# Altium PCB PCB.PcbDoc
Units mil, origin at the board's own origin, x right, y up, seen from the top; angles counter-clockwise.
Board outline 1574.8 x 1929.13 mil, 2 copper layers (Top Layer, Bottom Layer), stack 65.792 mil thick; 18 components, 11 nets, 73 pads, 7 vias.
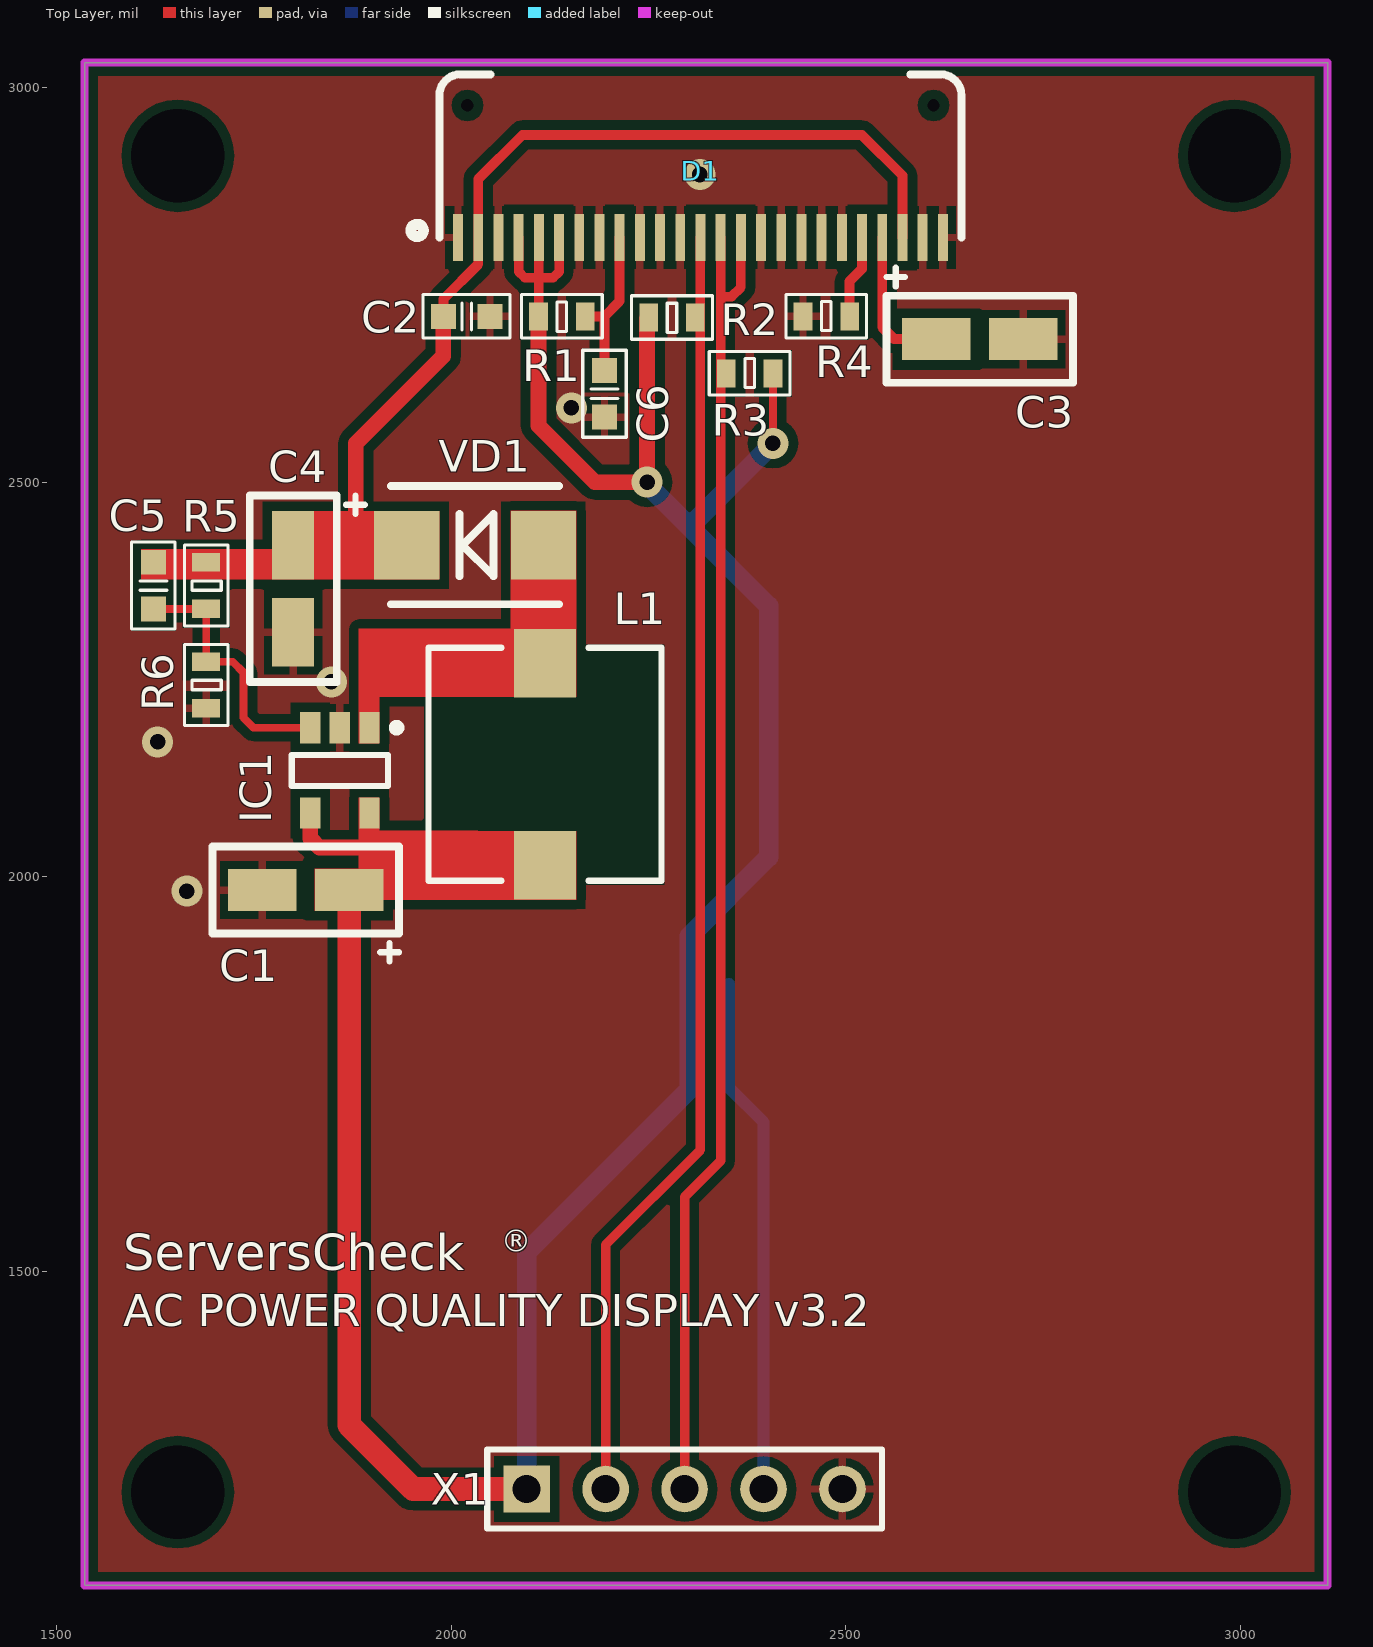
[diagram p0: Top Layer view]
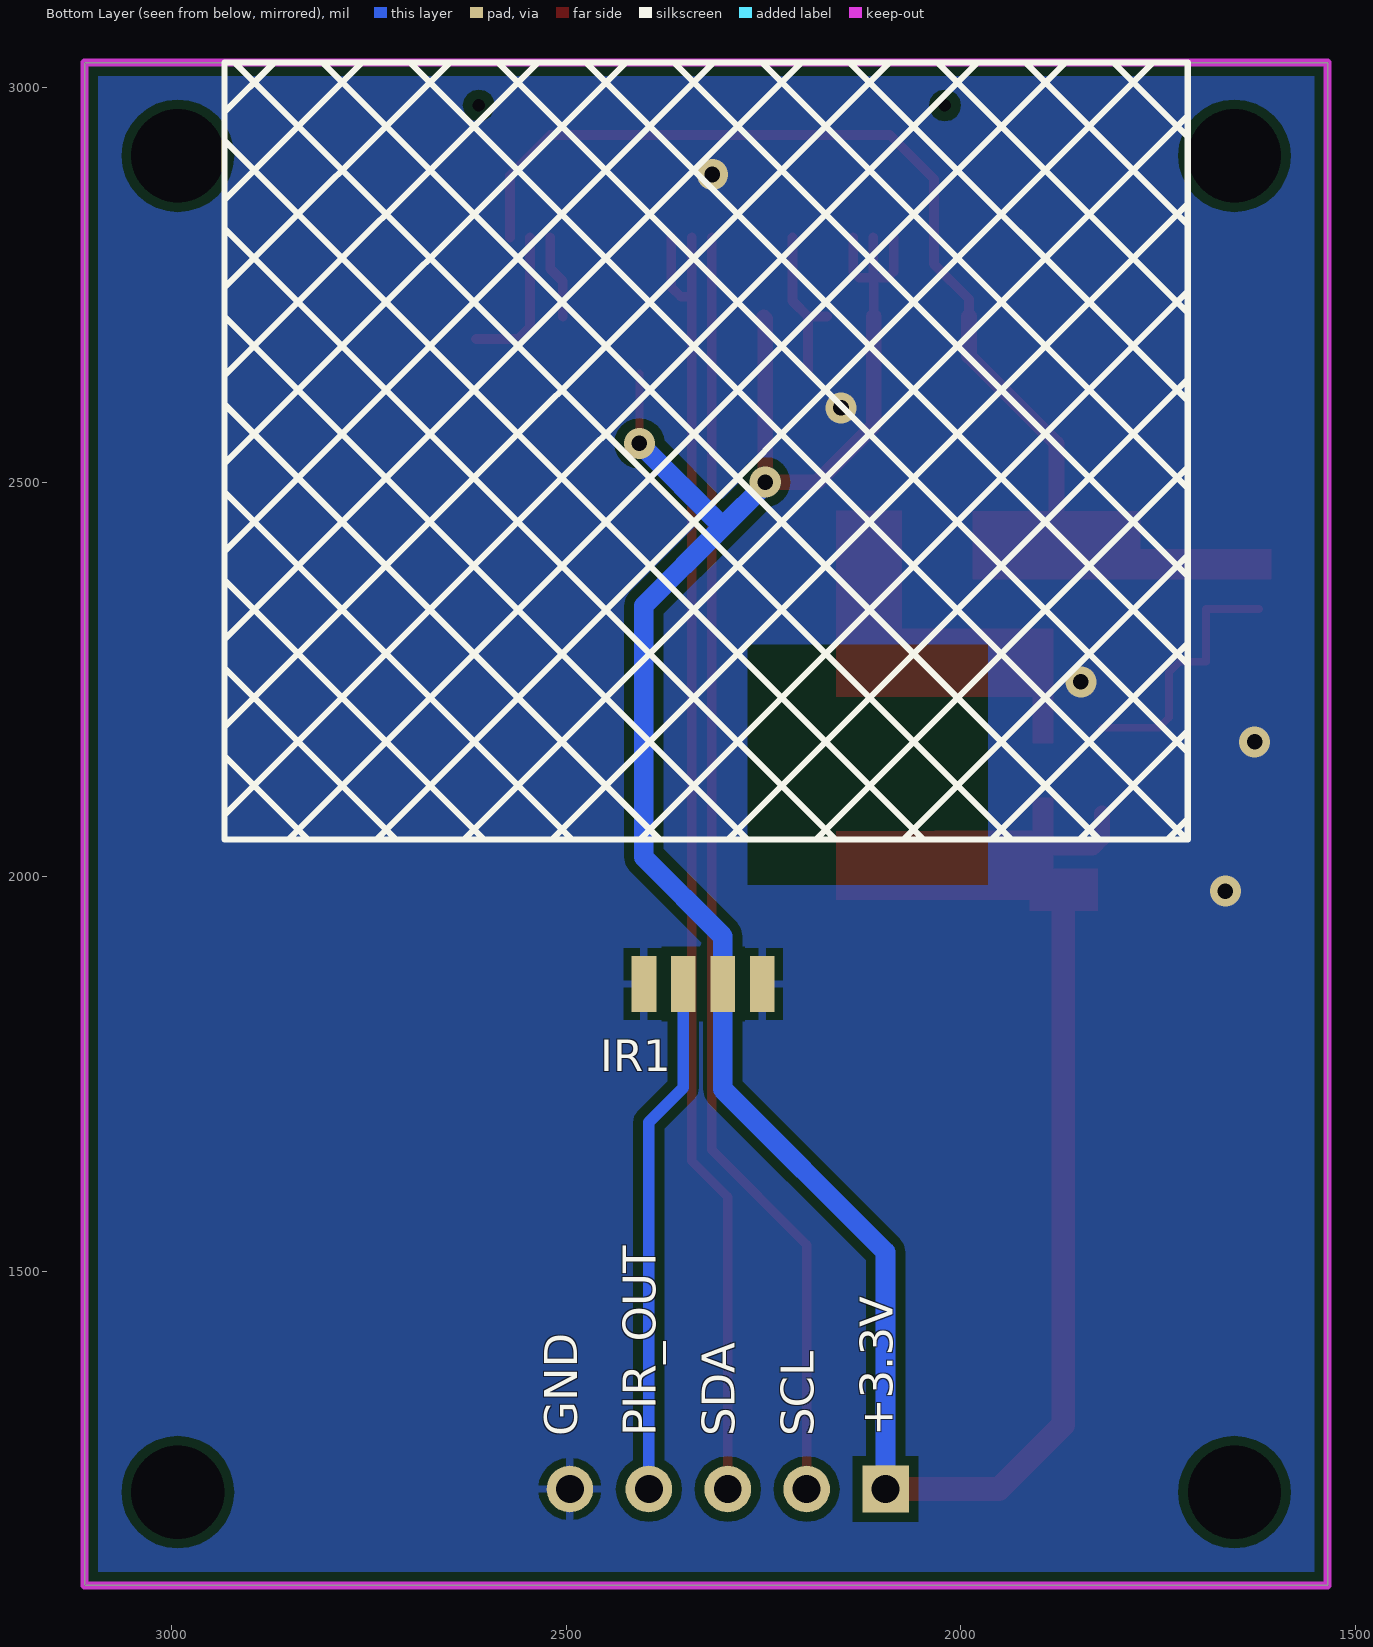
[diagram p1: Bottom Layer view, seen from below]

## Layer stack, top to bottom
Top Solder: solder mask 0.4, Solder Resist, Dk 3.5
Top Layer: signal copper 1.4
Dielectric 1: dielectric 62.9921, FR-4, Dk 4.8
Bottom Layer: signal copper 1.4
Bottom Solder: solder mask 0.4, Solder Resist, Dk 3.5

## Board outline
1535.43,1102.36 3110.24,1102.36 3110.24,3031.5 1535.43,3031.5

## Design rules (kind name [scope] priority, off if disabled: settings)
Clearance [All] p1: gap=7.87 ignorepadtopadclearanceinfootprint=FALSE except(11.81: Arc-Poly Track-Poly SMDPad-Poly THPad-Poly Via-Poly Fill-Poly Poly-Poly Poly-Region Poly-Text Poly-Hole)
HoleSize [All] p1: absolutevalues=TRUE maxlimit=118.11 minlimit=1 maxpercent=80.000 minpercent=20.000
MinimumSolderMaskSliver [All] p1: minsoldermaskwidth=0
PolygonConnect [All] p1: thpad.connectstyle=Relief thpad.reliefconductorwidth=10 thpad.reliefentries=4 thpad.polygonreliefangle="90 Angle" thpad.airgapwidth=10 smdpad.connectstyle=Relief smdpad.reliefconductorwidth=10 smdpad.reliefentries=4 smdpad.polygonreliefangle="90 Angle" smdpad.airgapwidth=10 via.connectstyle=Direct via.reliefconductorwidth=10 via.reliefentries=4 via.polygonreliefangle="90 Angle" via.airgapwidth=10
RoutingVias [All] p1: holewidth=28 width=50 viastyle="Through Hole" minholewidth=19.68 minwidth=39.37 maxholewidth=28 maxwidth=50
SilkToSilkClearance [All] p1: silktosilkclearance=2
SilkToSolderMaskClearance [IsPad] p1: minsilkscreentomaskgap=0 clearancetoexposedcopper=TRUE
SolderMaskExpansion [All] p1: expansion=4
Width [All] p1: maxlimit=100 minlimit=10 preferedwidth=50
26 further rules are at their usual default settings.

## Components (designator, comment, footprint, x,y, rotation, side; value= is the part's Value field where it differs from the comment)
C1 "4.7u" TANTALUM_CAP_SIZE_A 1815.44,1983.17 r180 top
C2 "100n" C_0603 2019.42,2710 r180 top
C3 "4.7u" TANTALUM_CAP_SIZE_A 2669.29,2681.1 r0 top
C4 "4.7u" TANTALUM_CAP_SIZE_A 1799.69,2365.06 r270 top
C5 "100n" C_0603 1622.53,2369 r90 top
C6 "100n" C_0603 2194,2612 r270 top
D1 "UG-9664HSWAG01" UG-9664HSWAG01 2315.59,2810 r0 top
IC1 "FAN5331" SOT23-5 1858.75,2134.75 r270 top
IR1 "TSSP77P38" TSSP77P38 2326.77,1864.17 r0 bottom
L1 "10uH" L-7.5x7.5 2118.59,2142.62 r90 top
R1 "10k" R_0603 2140,2710 r0 top
R2 "4.7k" R_0603 2279.53,2708.66 r0 top
R3 "4.7k" R_0603 2377.95,2637.8 r180 top
R4 "910k" R_0603 2475,2710 r180 top
R5 "150k" R_0603 1689.46,2369 r90 top
R6 "20k" R_0603 1689.46,2243.02 r90 top
VD1 "Schottky Diode" DO-214AA 2030.01,2420.18 r180 top
X1 "PLS-5" PLS-5-3D 2095.5,1224.41 r0 top

## Footprints (in the part's own frame and the unit in brackets; to place one, negate y for a bottom-side part, rotate by r counter-clockwise, add the part's x,y. Pads: shape width x height; smd on the part's side, far side on the other; paste and mask are expansions set on the pad)
C_0603 [mm] "Chip Capacitor; Body 1.6 x 0.8 mm (LxW typ)"
  rect 0.8x0.8 smd: 1(-0.75,0) 2(0.75,0)
  silkscreen extent -1.4,-0.7 1.4,0.7, body extent -0.8,-0.4 0.8,0.4, height 0.3
DO-214AA [mm]
  rect 2.1x2.2 smd: A(-2.2,0) C(2.2,0)
  silkscreen extent -2.7,-1.9 2.7,1.9, body extent -2.7,-1.8 2.7,1.8, height 2.4
L-7.5x7.5 [mm]
  rect 2.2x2 smd: 1(-3.25,0) 2(3.25,0)
  silkscreen extent -3.75,-3.75 3.75,3.75, body extent -3.65,-3.61 3.65,3.69, height 4.5
PLS-5-3D [mm] "Connector; Header; 5 Position"
  rect 1.5x1.5 hole 0.9: 1(0,0)
  round 1.5 hole 0.9: 2(2.54,0) 3(5.08,0) 4(7.62,0) 5(10.16,0)
  silkscreen extent -1.27,-1.27 11.43,1.27, body extent -1.27,-1.27 11.43,1.27, height 8.44
R_0603 [mm]
  rect 0.6x0.9 smd: 1(-0.75,0) 2(0.75,0)
  silkscreen extent -1.3,-0.7 1.3,0.7, body extent -0.8,-0.41 0.8,0.41, height 0.45
SOT23-5 [mm]
  rect 1x0.65 smd: 1(-1.375,0.95) 2(-1.375,0) 3(-1.375,-0.95) 4(1.375,-0.95) 5(1.375,0.95)
  silkscreen extent -1.5,-1.55 0.5,1.95, body extent -1.25,-1.5 1.25,1.5, height 1.15
TANTALUM_CAP_SIZE_A [mm]
  rect 2.2x1.35 smd: 1(-1.4,0) 2(1.4,0)
  silkscreen extent -3,-1.4 3,2.3, body extent -1.7,-0.9 1.7,0.9, height 1.86
TSSP77P38 [mm]
  rect 0.8x1.8 smd: 1(-1.905,0) 2(-0.635,0) 3(0.635,0) 4(1.905,0)
  body extent -3.4,-1.48 3.4,1.52, height 3.2
UG-9664HSWAG01 [mm]
  rect 0x0 hole 0.4: 0(-7.5,4.25) 0(7.5,4.25)
  rect 0.32x1.5 smd: 1(-7.8,0) 2(-7.15,0) 3(-6.5,0) 4(-5.85,0) 5(-5.2,0) 6(-4.55,0) 7(-3.9,0) 8(-3.25,0) 9(-2.6,0) 10(-1.95,0) 11(-1.3,0) 12(-0.65,0) 13(0,0) 14(0.65,0) 15(1.3,0) 16(1.95,0) 17(2.6,0) 18(3.25,0) 19(3.9,0) 20(4.55,0) 21(5.2,0) 22(5.85,0) 23(6.5,0) 24(7.15,0) 25(7.8,0)
  silkscreen extent -8.4,0 8.4,5.25

## Part data
C1 C3 C4: library part "Tantalum Capacitor", "Tantalum Capacitor"
C2 C5 C6: library part C0603, "Capacitor"
D1: "Display"
IC1: "High Efficiency Serial LED Driver and OLED Supp;y with 20V Integrated Switch"
IR1: "IR Detector for Mid Range Proximity Sensor"
L1: library part L, "Inductor"
R1 R2 R3 R4 R5 R6: library part R0603, "Resistor"
VD1: library part Schottky, "SCHOTTKY BARRIER RECTIFIER"
X1: "Header, 5-Pin", LatestRevisionDate=17-Jul-2002, LatestRevisionNote="Re-released for DXP Platform.", Publisher="Altium Limited"

## Free pads (board coordinates)
  round 0 hole 118.11: 0(1653.54,1220.47) 0(1653.54,2913.39) 0(2992.13,1220.47) 0(2992.13,2913.39)

## Via types
v1: diameter 39.37, hole 19.68, Top Layer to Bottom Layer, tented both sides, 7 vias

## Nets (pads, with @x,y where several pads share a name; then routed paths per layer and width w, separated by ;. In a path a pad name is that pad's centre, name@x,y a point inside that pad or via, vN(x,y) a via of type N, cw(c..) or ccw(c..) an arc to the next point about the centre after c; other vN are vias at no path point)
3.3V: C1.1 D1.4 D1.5 D1.6 IC1.4 IC1.5 IR1.2 L1.1 R1.1 R2.1 R3.1 X1.1 | length 3515.2
  Top Layer w10: v1(2407.48,2549.21) R3.1
  Top Layer w12: D1.4 2085.28,2766.72 2093,2759 2110.73,2759 ; R1.1 2110.47,2758.74 2110.73,2759 ; D1.5 2110.87,2759.13 2110.73,2759 ; D1.6 2136.46,2766.46 2129,2759 2110.73,2759
  Top Layer w20: IC1.4 1821.35,2048.72 1833.06,2037 1899,2037 1900,2038 ; R1.1 2110.47,2571.53 2182,2500 v1(2248,2500) 2248,2706.66 R2.1
  Top Layer w30: C1.1 1870.56,1305.44 1951.59,1224.41 X1.1
  Bottom Layer w25: X1.1 2095.5,1524.63 2301.77,1730.91 IR1.2 2301.77,1924.77 2402,2025 2402,2343.28 2301.77,2443.5 ; v1@2246.64,2498.64 2301.77,2443.5 ; v1(2407.48,2549.21) 2301.77,2443.5
10.46V: C2.2 C4.1 C5.2 D1.2 D1.23 R5.2 VD1.C | length 1188.7
  Top Layer w12.6: C2.2 1989.89,2731.89 2034.09,2776.09 D1.2 2034.09,2884.09 2090,2940 2520,2940 2571.5,2888.5 D1.23
  Top Layer w20: 1879,2420 1879,2549 1989.89,2659.89 C2.2
GND: C1.2 C2.1 C3.2 C4.2 C6.2 D1.1 D1.3 D1.7 D1.8 D1.10 D1.11 D1.12 D1.16 D1.17 D1.18 D1.19 D1.20 D1.24 D1.25 IC1.2 IR1.1 IR1.4 R4.2 R6.1 X1.5
  other v1: 1665,1982 1628,2171 1848,2246.95 2152,2594 2314.96,2889.76
NetC3_1: C3.1 D1.22 | length 188.3
  Top Layer w12.6: D1.22 2545.91,2696.22 2561.02,2681.1 C3.1
NetC5_1: C5.1 IC1.3 R5.1 R6.2 | length 333.8
  Top Layer w10: C5.1 R5.1 R6.2 1722.92,2272.54 1736.7,2258.76 1736.7,2201.68 1749.5,2188.88 IC1.3
NetC6_1: C6.1 D1.9 R1.2 | length 200.9
  Top Layer w12.6: R1.2 2194,2710 ; C6.1 2194,2710 ; D1.9 2213.23,2729.23 2194,2710
NetD1_21: D1.21 R4.1 | length 106.5
  Top Layer w12.6: R4.1 2504.53,2754.53 2520.31,2770.31 D1.21
NetIC1_1: IC1.1 L1.2 VD1.A
PIR_OUT: IR1.3 X1.4 | length 657.9
  Bottom Layer w15: IR1.3 2351.77,1732.87 2395.5,1689.15 X1.4
SCL: D1.13 R2.2 X1.2 | length 1635.3
  Top Layer w12: X1.2 2195.5,1533.86 2315.59,1653.95 2315.59,2708.66 D1.13
SDA: D1.14 D1.15 R3.2 X1.3 | length 1698.2
  Top Layer w12: X1.3 2295.5,1594.49 2341.18,1640.17 2341.18,2637.8 2341.18,2735 ; D1.14 2341.18,2735 ; D1.15 2366.77,2746.77 2355,2735 2341.18,2735
pads on no net: D1.0

## Polygon pours and split planes (outlines as drawn)
no net on Bottom Overlay (hatched 45Degree grid 78.74 track 7.87, remove dead copper): 1712.6,3031.5 2933.07,3031.5 2933.07,2047.24 1712.6,2047.24
GND on Bottom Layer "Bottom Layer-GND" (solid, remove dead copper, pour order 0): 1535.43,3149.61 3110.24,3149.61 3110.24,1102.36 1535.43,1102.36
GND on Top Layer "Top Layer-GND" (solid, remove dead copper, pour order 2): 1535.43,3149.61 3110.24,3149.61 3110.24,1102.36 1535.43,1102.36

## Keep-outs
Keep-Out Layer:
  the board outline again, w10

## Other copper
Top Layer:
  pour cut-out: 2270,2294 1966,2294 1966,1990 2270,1990
  region net 10.46V: 1985,2463 1773,2463 1773,2415 1607,2415 1607,2377 1985,2377
  region net 3.3V: 2158,2058 2158,1971 1913,1971 1913,1957 1827,1957 1827,2010 1883,2010 1883,2100 1909,2100 1909,2059
  region net NetIC1_1: 1883,2169 1883,2314 2075,2314 2075,2464 2158,2464 2158,2314 2158,2228 1909,2228 1909,2169
Bottom Layer:
  pour cut-out: 2270,2294 1966,2294 1966,1990 2270,1990

## Silkscreen, mask and mechanical layers (free items; w line width, h text height)
Top Overlay:
  circle w13.78: c1956.69,2818.9 r7.87
  text "®" at 2062.99,1515.75 h47.24
  text "ServersCheck" at 1584.65,1486.22 h78.74
  text "AC POWER QUALITY DISPLAY v3.2" at 1584.65,1417.32 h70
Bottom Overlay:
  text "+3.3V" at 2072.44,1291.34 h70.87 r270
  text "SCL" at 2172.44,1291.34 h70.87 r270
  text "SDA" at 2272.44,1291.34 h70.87 r270
  text "PIR_OUT" at 2372.44,1291.34 h70.87 r270
  text "GND" at 2472.44,1291.34 h70.87 r270

## Dimensions
1653.54,2913.39 to 1535.43,3031.5 on Mechanical 1
1653.54,2913.39 to 1535.43,3031.5 on Mechanical 1
3110.24,1102.36 to 3110.24,3031.5 on Mechanical 1
1535.43,1102.36 to 3110.24,1102.36 on Mechanical 1